# EAGLE board pcb_design (EAGLE 9.3.0)
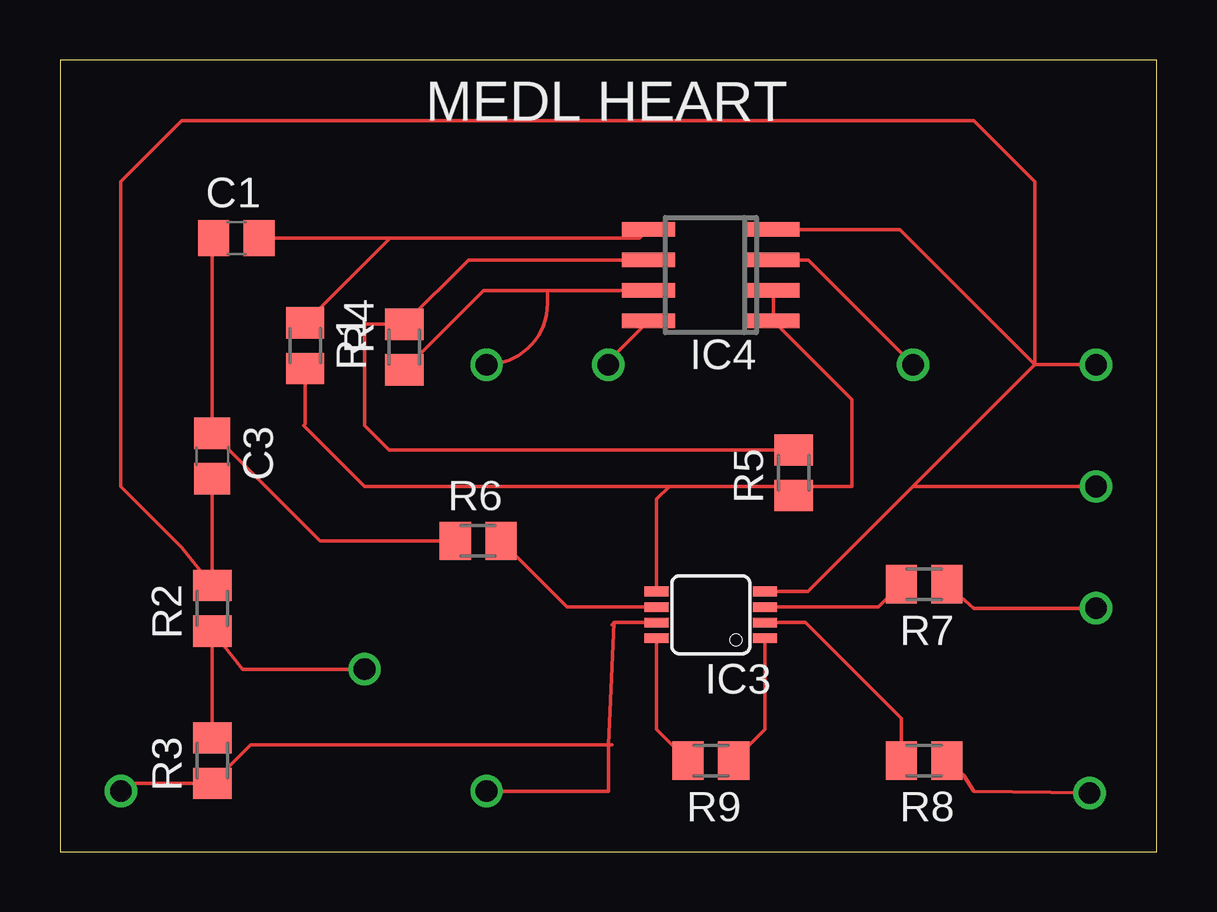
[diagram p0: board, top side]
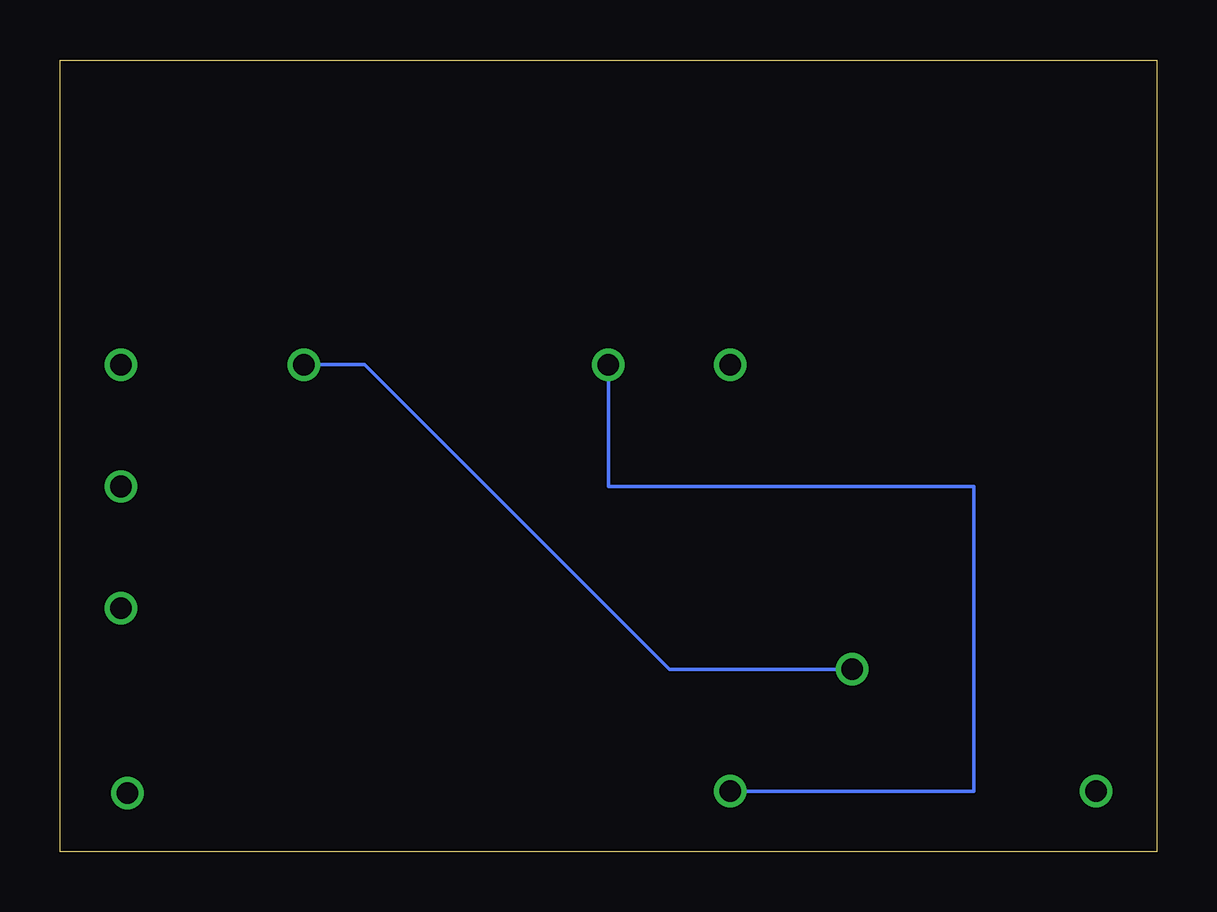
[diagram p1: board, bottom side, seen from below]

Size 45.72 x 33.02 mm. Coordinates in mm from the lower left corner, seen from the top.
Outline: 0,0 45.72,0 45.72,33.02 0,33.02 0,0
Copper layers (1*16): Top 0.035mm / dielectric 1.5mm / Bottom 0.035mm
Design rules "default": minimum track width 6mil, minimum drill 0.35mm, track to track 6mil, track to pad 6mil, pad to pad 6mil, via to via 6mil, smd to smd 6mil, copper to edge 40mil, drill to drill 6mil, minimum pad ring 10mil, minimum via ring 8mil, stop-mask expansion 4mil, vias tented up to drill 0mil, thermal gap 10mil

## Footprints (pad centres in the part's own frame; a part is rotated, then mirrored left to right if it is on the bottom)
C0805 = smd 1.3 x 1.5: 1 -0.95,0; 2 0.95,0
MSOP08 = smd 0.4 x 1: 1 -0.976,-2.263; 2 -0.326,-2.263; 3 0.324,-2.263; 4 0.974,-2.263; 5 0.974,2.262; 6 0.324,2.262; 7 -0.326,2.262; 8 -0.976,2.262
SO08 = smd 0.6 x 2.2: 1 -1.905,-2.6; 2 -0.635,-2.6; 3 0.635,-2.6; 4 1.905,-2.6; 5 1.905,2.6; 6 0.635,2.6; 7 -0.635,2.6; 8 -1.905,2.6
M0805 = smd 1.3 x 1.6: 1 -0.95,0; 2 0.95,0

## Placement (x,y rotation side)
C1  [C0805]  7.35,25.59 0 top
C3  [C0805]  6.35,16.51 270 top
IC3  AD623RM  [MSOP08]  27.13,9.89 90 top
IC4  LM4558D  [SO08]  27.13,24.05 90 top
R1  [M0805]  10.22,21.11 270 top
R2  100  [M0805]  6.35,10.16 90 top
R3  100  [M0805]  6.35,3.81 90 top
R4  [M0805]  14.35,21.05 90 top
R5  [M0805]  30.59,15.81 90 top
R6  [M0805]  17.43,12.97 0 top
R7  [M0805]  36.02,11.16 180 top
R8  [M0805]  36.02,3.81 180 top
R9  [M0805]  27.13,3.81 180 top

## Library data of the parts
C1 C3 = rcl; SPICEPREFIX: C
IC3 = analog-devices; MPN: AD623ARMZ; OC_FARNELL: 1660961; OC_NEWARK: 19M8824
IC4 = linear
R1-R9 = rcl; SPICEPREFIX: R

## Nets
0: C3.2 IC3.4 IC4.4 R2.2
+5V: IC3.7 IC4.8 R3.1
N$1: IC4.3 R2.1 R3.2
N$2: IC4.6 R4.2 R5.2
N$3: IC3.5 IC4.1 IC4.2 R1.2 R5.1
N$4: IC4.7 R4.1
N$5: C1.2 IC4.5 R1.1
N$6: C1.1 C3.1 R6.1
N$7: IC3.6 R6.2
N$8: IC3.3 R7.2
N$9: IC3.2 R8.2
N$10: R7.1
N$11: R8.1
N$12: IC3.1 R9.1
N$13: IC3.8 R9.2

## Tracks (layer width: path | path; a pad name or v marks a point on that pad's centre or on a via)
0  (via drill 0.9)
  Top 0.152: C3.2 R2.2 5.08,12.7 2.54,15.24 2.54,27.94 5.08,30.48 38.1,30.48 40.64,27.94 40.64,20.32 | IC3.4 31.18,10.86 35.56,15.24 | 35.56,15.24 40.64,20.32 | IC4.4 35.01,25.96 40.64,20.32 | 35.56,15.24 v43.18,15.24 | 40.64,20.32 v43.18,20.32
+5V  (via drill 0.9)
  Top 0.152: 22.86,4.46 7.95,4.46 R3.1 2.86,2.86 arc90 v2.54,2.54 | 22.86,4.46 23,4.46 | 23,9.46 23.1,9.56 | 23.1,9.56 IC3.7 | IC4.8 22.86,20.48 v22.86,20.32 | v17.78,2.54 22.86,2.54 22.86,4.46 | 22.86,4.46 23.1,9.56
  Bottom 0.152: v22.86,20.32 22.86,15.24 7.62,15.24 7.62,2.54 v17.78,2.54
N$1  (via drill 0.9)
  Top 0.152: R3.2 R2.1 7.62,7.62 v12.7,7.62 | v35.56,20.32 31.2,24.69 IC4.3
  Bottom 0.152: v12.7,7.62 20.32,7.62 33.02,20.32 v35.56,20.32
N$2
  Top 0.152: R4.2 14.81,22.46 | 24.3,24.46 IC4.6 17.04,24.69 R4.2 | R4.2 12.7,22 12.7,17.78 13.72,16.76 R5.2
N$3
  Top 0.152: 30,23.46 29.95,23.41 IC4.2 IC4.1 33.02,18.86 33.02,15.24 30.97,15.24 R5.1 | 30.99,14.46 R5.1 | R1.2 10.22,17.84 10.16,17.78 12.7,15.24 25.4,15.24 | 25.4,15.24 30.21,15.24 R5.1 | IC3.5 24.87,14.71 25.4,15.24
N$4  (via drill 0.9)
  Top 0.152: R4.1 17.66,23.41 20.32,23.41 | 20.32,23.41 IC4.7 | v17.78,20.32 arc90 20.32,22.86 20.32,23.41
N$5
  Top 0.152: IC4.5 24.16,25.59 13.75,25.59 R1.1 | C1.2 15.24,25.59
N$6
  Top 0.152: C1.1 6.35,25.54 C3.1 10.84,12.97 R6.1
N$7
  Top 0.152: R6.2 21.14,10.21 IC3.6
N$8
  Top 0.152: IC3.3 34.12,10.21 R7.2
N$9
  Top 0.152: IC3.2 31.08,9.56 35.07,5.57 R8.2
N$10  (via drill 0.9)
  Top 0.152: R7.1 38.1,10.16 v43.18,10.16
N$11  (via drill 0.9)
  Top 0.152: R8.1 37.65,3.22 38.1,2.54 v42.91,2.46
N$12
  Top 0.152: R9.1 29.39,5.12 IC3.1
N$13
  Top 0.152: IC3.8 24.87,5.12 R9.2

## Text on the board
tNames: MEDL HEART